# Altium PCB senzMate_ecandMoisture_pcb_design_cycle_2.PcbDoc (part 2 of 2)
Units mil, origin at the board's own origin, x right, y up, seen from the top; angles counter-clockwise.
Board outline 984.25 x 5177.17 mil, 2 copper layers (Top Layer, Bottom Layer); 38 components, 18 nets, 84 pads, 27 vias.
Unrouted connection lines stored in the file: 1.
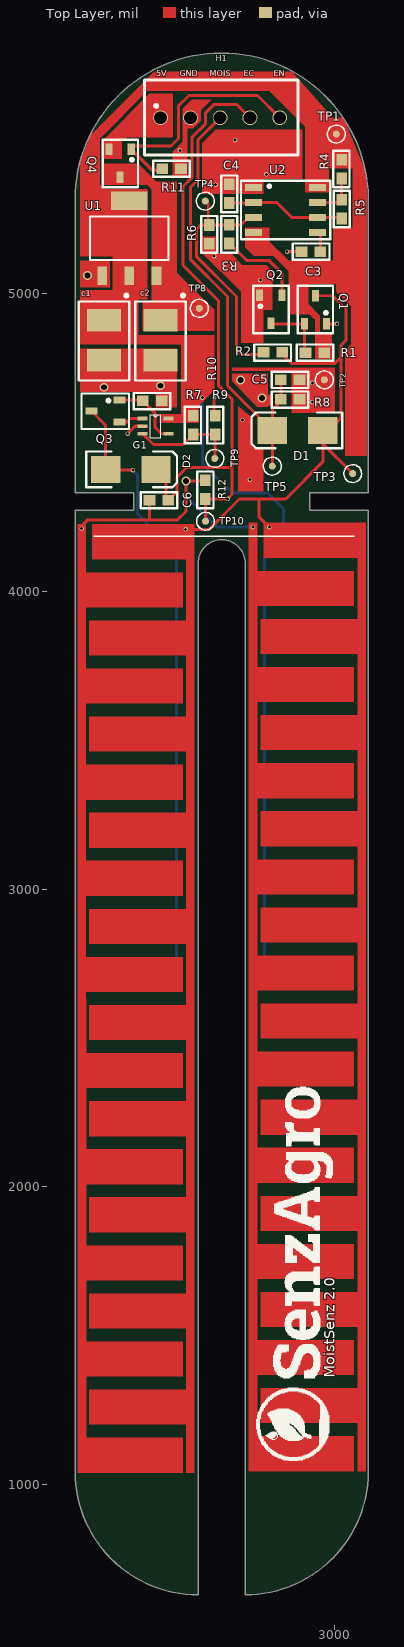
[diagram p0: Top Layer view]

## Other copper (continued)
Top Layer: (continued)
  rectangle net PROBE_MOIST: 2750.04,1852.08 3085,1970.19
  rectangle net GND: 2725,2013.49 3065,2131.6
  rectangle net PROBE_MOIST: 2750.04,2174.91 3085,2293.02
  rectangle net GND: 2720,2336.32 3065,2454.43
  rectangle net PROBE_MOIST: 2750.04,2497.74 3085,2615.85
  rectangle net GND: 2725,2659.15 3065,2777.26
  rectangle net PROBE_MOIST: 2750.04,2820.57 3090,2938.68
  rectangle net GND: 2725,3304.81 3065,3422.92
  rectangle net PROBE_MOIST: 2750.04,3466.23 3085,3584.34
  rectangle net GND: 2725,3627.64 3065,3745.75
  rectangle net PROBE_MOIST: 2750.04,3789.06 3085,3907.17
  region net PWR_OP_AMP: 2145,4860 2595,4860 2595,4675 2541.26,4621.26 2541.26,4565 2412,4565 2412,4595 2485,4595 2485,4830 2145,4830
  region net PWR_OP_AMP: 2935,4925 2935,4780 2990,4780 2990,4865 2977.5,4865 2972.5,4865 2950,4865 2950,4925
  region net PWR_OP_AMP: 2980,5385
  region net PWR_OP_AMP: 2977.83,5590 3028.06,5590 3107.09,5399.09 3107.09,5031.81 2907.09,5031.81 2837.58,5101.32 2845.35,5109.09 3060,5109.09 3060,5419.53 2977.83,5419.53
  region net PWR_OP_AMP: 3085,5220 2995,5220 2995,5105 3085,5105
  region net PWR_OP_AMP: 2845,5075 2845,4930 2915,4930 2930,4915 2950,4915 2950,4925 2910,4965 2910,5028.9 2863.9,5075
  region net PWR_OP_AMP: 2699.09,5220.36 2780.35,5220.36 2780.35,5174.09 2845.35,5109.09 2874.25,5109.09 2875.35,5107.99 2875.35,5064.09 2855.35,5064.09 2793.41,5126.04 2728.41,5126.04 2698.74,5155.71
  region net PWR_OP_AMP: 2780,5152.72
  region net PWR_OP_AMP: 3007.09,5031.81 3005,5029.72 3005,5005 3055,4955 3055,4830 3035,4810 3035,4455 3107.09,4455 3107.09,5031.81
  region net PWR_OP_AMP: 3015,5015
  region net PWR_OP_AMP: 2221.86,5350 2218.12,5128.73 2255,5128.73 2255,4980 2370,4980 2370,5350
  region net PWR_OP_AMP: 2261,5125.14 2145,5125.14 2145,5440 2162,5483 2180.62,5531.62 2394,5745 2856.15,5745 2980,5605 2980,5340 2900,5340 2900,5560 2780,5680 2370,5680 2210,5520 2210,5366.59 2261,5302.14
  region net PWR_OP_AMP: 2145,5010 2145,4845 2340,4845 2340,5010
  region net GND: 2490,5620.71 2490,5510 2505,5510 2505,5555 2525,5555 2550,5580 2550,5615 2585,5650 2519.29,5650
  region net Netc2_1: 2225,5365 2370,5365 2385,5350 2405,5350 2405,5370 2340,5435 2225,5435
  region net Netc2_1: 2385,5375 2470,5375 2470,5070 2595,4945 2595,4875 2355,4875 2355,4970 2385,4970
  pour cut-out: 2795,5305
  pour cut-out: 2700,5370
  pour cut-out: 2689.17,5376.81 2689.17,5183.19 2980.83,5183.19 2980.83,5376.81
  region: 2430,5260
  region: 2585,5545
  region: 2545,5545
  region: 2555,5545
  region net GND: 2815,4400
  region: 2815,5625
  region net PROBE_MOIST: 2515,4120
  region net PROBE_MOIST: 2501.25,4225 2501.25,1040 2528.75,1039.99 2528.75,4225
  region net GND: 2136.25,4225 2136.25,1040.01 2165,1039.99 2163.75,4225
  region net GND: 2711.25,4230 2711.25,1045.01 2740,1044.99 2738.75,4230
  region net PROBE_MOIST: 3076.25,4230 3076.25,1044.49 3103.75,1044.49 3103.75,4230
  region: 2255,5005
  region: 2285,4995
  region net VIN: 2285,5452.5 2285,5511.14 2304.06,5525 2455,5525 2455,5670 2377.5,5670 2225,5517.5 2225,5452.5
  region net GND: 2145,4815 2470,4815 2470,4618 2399,4618 2399,4670 2145,4670
  region net GND: 2145,5110 2245,5110 2245,5020 2145,5020
  region net GND: 2760,5335 2760,5385 2890,5385 2890,5550 2600,5550 2555,5505 2555,5335 2595,5335
  region net GND: 2550,5190 2600,5190 2600,5135 2650,5135 2690,5095 2770,5095 2790,5075 2790,4945 2760,4945 2760,4835 2685,4835 2685,5005 2550,5140
  region net GND: 2855,4600 3000,4600 3000,4750 2655,4750 2655,4740 2855,4740
  region net GND: 2775,4730 2775,4660 2785,4660 2785,4630 2775,4620 2740,4620 2655,4705 2655,4730
  region net GND: 2455,5475 2455,5395 2505,5395 2505,5525
  region net GND: 2675,4621.31 2675,4335 2760,4335 2760,4480 2725,4480 2725,4581.31
Bottom Layer:
  pour cut-out: 2685,5375 2685,5180 2985,5180 2985,5380
  pour cut-out: 2685,5375 2685,5180 2985,5180 2985,5380
  pour cut-out: 2980,5315

## Silkscreen, mask and mechanical layers (free items; w line width, h text height)
Top Overlay:
  drawing of 12 lines, arcs and shapes, not listed
  text "5V" at 2400,5730 h20
  text "GND" at 2480,5730 h20
  text "MOIS" at 2580,5730 h20
  text "EC" at 2695,5730 h20
  text "EN" at 2795,5730 h20
  text "MoistSenz 2.0" at 3012,1359 h60 r90
Mechanical 1:
  the board outline again, w0.5